# Altium PCB PDC_Rev_2.PcbDoc (part 3 of 3)
Units mil, origin at the board's own origin, x right, y up, seen from the top; angles counter-clockwise.
Board outline 5005 x 4200 mil, 4 copper layers (Top Layer, Signal_1, Signal_2, Bottom Layer), stack 23.756 mil thick; 184 components, 175 nets, 851 pads, 1149 vias.
Unrouted connection lines stored in the file: 187.
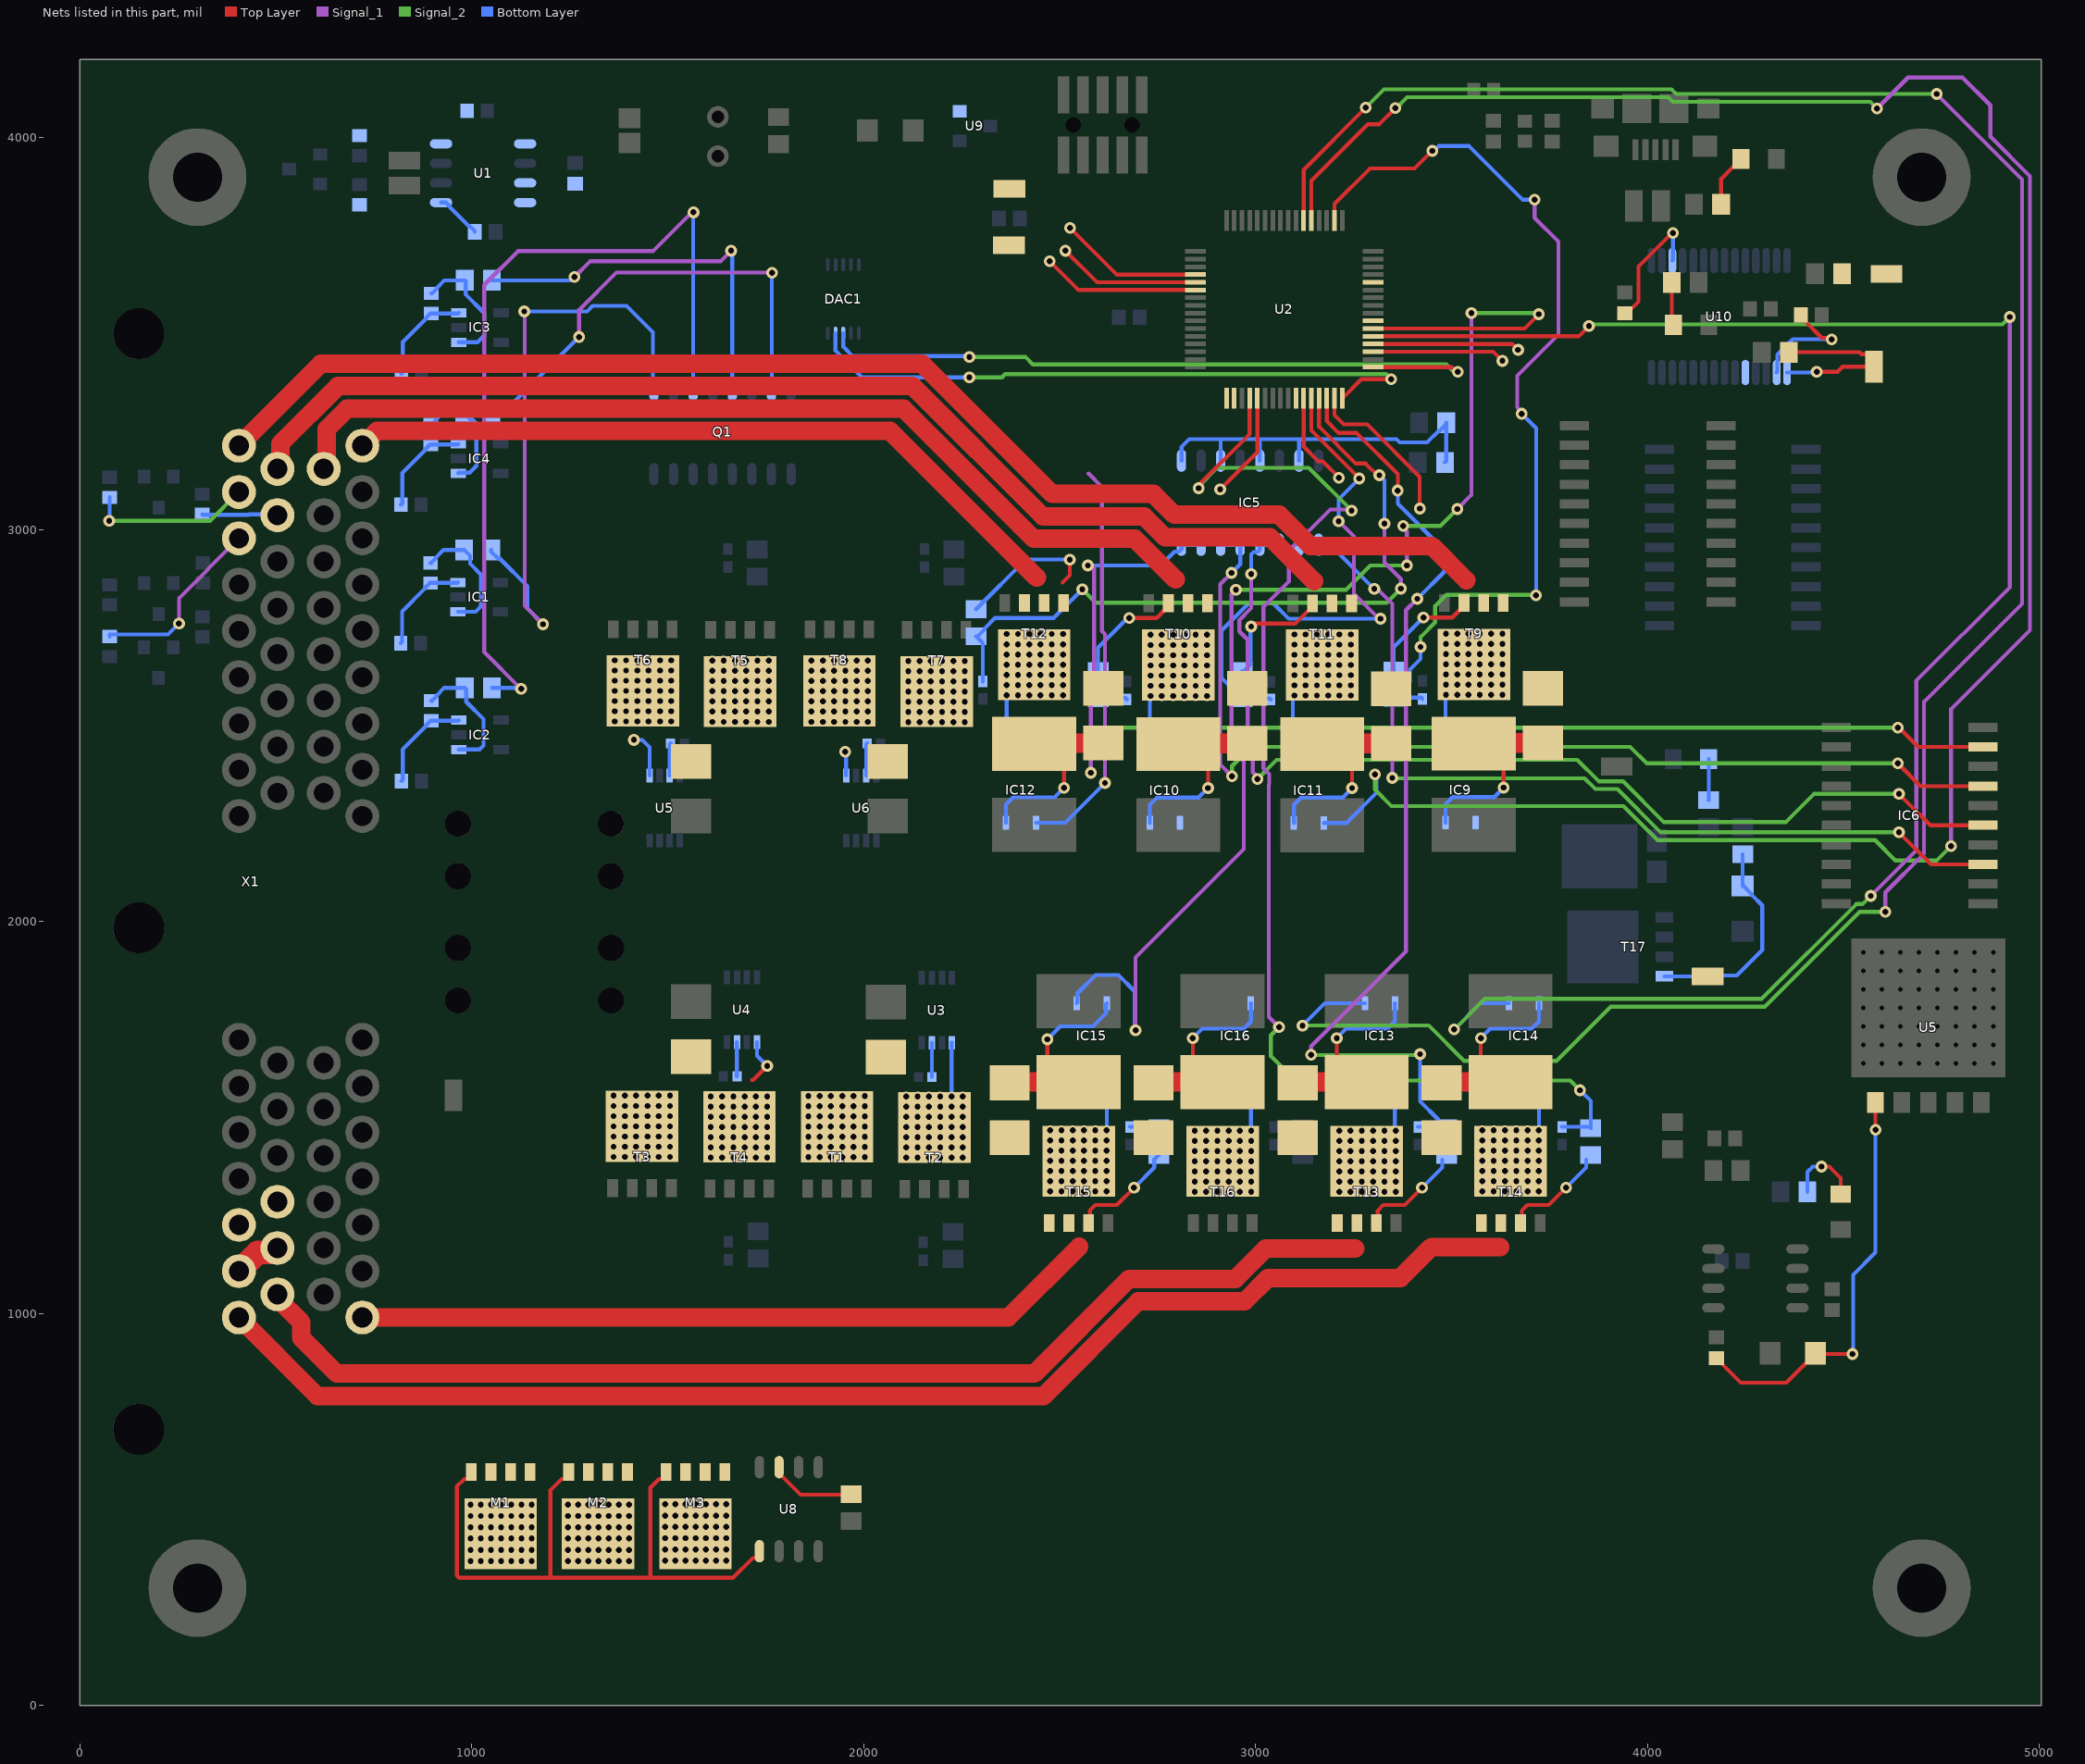
[diagram p5: the nets of this part, all layers, seen from the top]

## Via types
v1: diameter 25, hole 15, Top Layer to Bottom Layer, 876 vias
v2: diameter 30, hole 15, Top Layer to Bottom Layer, 268 vias
v3: diameter 50, hole 28, Top Layer to Bottom Layer, 4 vias
v4: diameter 55, hole 35, Top Layer to Bottom Layer, 1 vias

## Nets (pads, with @x,y where several pads share a name; then routed paths per layer and width w, separated by ;. In a path a pad name is that pad's centre, name@x,y a point inside that pad or via, vN(x,y) a via of type N, cw(c..) or ccw(c..) an arc to the next point about the centre after c; other vN are vias at no path point) (continued)
LC_2_ISENSE_ADC: IC15.5 U2.38 | length 3413.3
  Top Layer w10: U2.38@3300,3513.43 3686.43,3513.43 v2(3723,3550)
  Signal_1 w10: v2(2694,1723) 2694,1909 2970,2185 2970,2408 2939,2439 2939,2836 v2(2950,2847) ; v2(3377,3010) 3377,3004.59 3386,2995.59 v2(3386,2909) ; v2(3514.8,3053) 3551,3089.2 v2(3551,3553)
  Signal_2 w10: v2(2950,2847) 3231,2847 3293,2909 v2(3386,2909) ; v2(3377,3010) 3471.8,3010 v2(3514.8,3053) ; v2(3551,3553) 3720,3553 v2(3723,3550)
  Bottom Layer w10: IC15.5@2544.11,1791.89 2545.49,1793.28 2545.49,1817.49 2592,1864 2650,1864 2692,1822 2692,1725 v2(2694,1723)
LC_2_OUTPUT: R56.2 T15.1 T15.2 T15.3 X1.B7 | length 2183.6
  Top Layer w10: T15.3@2573.8,1231.47 2577.25,1234.92 2577.25,1263.25 2591,1277 2645.85,1277 v2(2690,1321.15)
  Top Layer w47.24: X1.B7@720.87,990.16 2369.18,990.16 2550.02,1171
  Bottom Layer w10: v2(2690,1321.15) 2741.62,1372.77 2741.62,1392.97 R56.2@2753.2,1404.55
LC_2_VSENSE_ADC: R56.1 R57.2 U2.21 | length 347.2
  Top Layer w10: v2(2910,3103) 3004.72,3197.72 U2.21@3004.72,3336.26
  Bottom Layer w10: R57.2@2679.81,1476.64 2750.01,1476.64 R56.1@2753.2,1473.45
LC_3_ISENSE_ADC: IC14.5 U2.37 | length 4640.8
  Top Layer w10: U2.37@3300,3493.74 3824.74,3493.74 v2(3851,3520)
  Signal_1 w10: v2(4570,2066) 4686,2182 4686,2614.72 4925,2853.72 v2(4925,3543)
  Signal_2 w10: v2(3507,1725) 3585.09,1803.09 4291.02,1803.09 4532.93,2045 4548.57,2045 4569.57,2066 v2(4570,2066) ; v2(3851,3520) 3855,3524 4512.57,3524 4906,3524 v2(4925,3543)
  Bottom Layer w10: v2(3507,1725) 3573.89,1791.89 IC14.5@3646.37,1791.89
LC_3_OUTPUT: R53.2 T14.1 T14.2 T14.3 X1.B26 | length 3721.8
  Top Layer w10: T14.3@3676.06,1231.47 3679.51,1234.92 3679.51,1263.25 3693.26,1277 3748.11,1277 v2(3792.26,1321.15)
  Top Layer w47.24: X1.B26@405.91,990.16 606.31,789.76 2459.24,789.76 2701,1031.51 2972.47,1031.51 3031.96,1091 3370,1091 3449,1170 3624,1170
  Bottom Layer w10: v2(3792.26,1321.15) 3843.88,1372.77 R53.2@3843.88,1392.97
LC_3_VSENSE_ADC: R53.1 R54.2 U2.20 | length 3294.4
  Top Layer w10: v2(2855,3106) 2855,3114 2985.04,3244.04 U2.20@2985.04,3336.26
  Signal_1 w10: v2(3060,1731) 3034,1757 3034,2350.57 3035,2351.57 3035,2376.43 3020,2391.43 3020,2803 3085,2868 3085,2946 3191,3052 3242,3052 v2(3245,3049)
  Signal_2 w10: v2(2855,3106) 2855,3111 2902,3158 3136,3158 v2(3245,3049) ; v2(3060,1731) 3039,1710 3039,1657 3101,1595 3803,1595 v2(3828,1570)
  Bottom Layer w10: R54.2@3782.08,1476.64 3850.64,1476.64 R53.1@3852,1478 ; v2(3828,1570) 3855.46,1542.54 R53.1@3855.46,1473.45
LC_4_ISENSE_ADC: IC13.5 U2.54 | length 6021
  Top Layer w10: U2.54@3122.83,3789.02 3122.83,3918.83 v2(3281,4077)
  Signal_1 w10: v2(4607,2025) 4607,2074.72 4706,2173.72 4706,2561 4956,2811 4956,3894 v2(4738,4112)
  Signal_2 w10: v2(3120,1735) 3442,1735 3532,1645 3768,1645 3906.09,1783.09 4299.3,1783.09 4541.21,2025 v2(4607,2025) ; v2(3281,4077) 3328,4124 4061.44,4124 4073.44,4112 v2(4738,4112)
  Bottom Layer w10: v2(3120,1735) 3176.89,1791.89 IC13.5@3278.95,1791.89
LC_4_OUTPUT: R50.2 T13.1 T13.2 T13.3 X1.B19 | length 3259.3
  Top Layer w10: T13.3@3308.64,1231.47 3312.09,1234.92 3312.09,1263.25 3325.84,1277 3380.69,1277 v2(3424.84,1321.15)
  Top Layer w47.24: X1.B19@504.33,1049.21 504.33,1038.56 565.2,977.69 565.2,937.91 656.1,847 2435.53,847 2677.29,1088.76 2948.76,1088.76 3026,1166 3255,1166
  Bottom Layer w10: v2(3424.84,1321.15) 3476.46,1372.77 R50.2@3476.46,1392.97
LC_4_VSENSE_ADC: R50.1 R51.2 U2.30 | length 2532.8
  Top Layer w10: U2.30@3181.89,3336.26 3181.89,3277.11 3212,3247 3258,3247 3363,3142 v2(3363,3100)
  Signal_1 w10: v2(3142,1660) 3142,1682 3384,1924 3384,2795 v2(3413,2824)
  Signal_2 w10: v2(3142,1660) 3418,1660 v2(3420,1662)
  Bottom Layer w10: v2(3363,3100) 3363,3066.43 3482,2947.43 3482,2893 v2(3413,2824) ; R51.2@3414.66,1476.64 3480.36,1476.64 R50.1@3481,1476 ; v2(3420,1662) 3420,1541.49 3466.47,1495.02 3466.47,1491.09 3484.11,1473.45 R50.1@3488.04,1473.45
LC_5_ISENSE_ADC: IC12.5 U2.36 | length 1401.7
  Top Layer w10: U2.36@3300,3474.06 3654.94,3474.06 v2(3670,3459)
  Signal_1 w10: 2574,3144 2608,3110 2608,2742.01 2616,2734.01 v2(2616,2354)
  Bottom Layer w10: IC12.5@2439.96,2252.58 2514.58,2252.58 v2(2616,2354)
LC_5_OUTPUT: R47.2 T12.1 T12.2 T12.3 X1.A1 | length 2248.5
  Top Layer w10: 2508,2866 2526,2884 v2(2526,2924)
  Top Layer w47.24: X1.A1@720.87,3214.57 758.3,3252 2067.73,3252 2442,2877.73
  Bottom Layer w10: R47.2@2287,2797.45 2413.55,2924 v2(2526,2924)
LC_5_VSENSE_ADC: R47.1 R48.2 U2.29 | length 1876.8
  Top Layer w10: U2.29@3162.2,3336.26 3162.2,3262.8 3256,3169 3281,3169 3311,3139 v2(3316,3139)
  Signal_1 w10: v2(3328.84,3016) 3328.84,2916.73 3371,2874.57 v2(3371,2850)
  Signal_2 w10: v2(2558,2848) 2592,2814 3335,2814 v2(3371,2850)
  Bottom Layer w10: R48.2@2304.26,2613.11 2304.26,2711.3 R47.1@2287,2728.55 2290.94,2728.55 2308.57,2746.19 2308.57,2748.6 2334.98,2775 2485,2775 v2(2558,2848) ; v2(3316,3139) 3328.84,3126.16 v2(3328.84,3016)
LC_6_ISENSE_ADC: IC11.5 U2.53 | length 5826.5
  Top Layer w10: U2.53@3142.52,3789.02 3142.52,3890.52 3287,4035 3316,4035 v2(3357,4076)
  Signal_1 w10: v2(4586,4075) 4665,4154 4804,4154 4875,4083 4875,4003.28 4976,3902.28 4976,2744 4775,2543 v2(4775,2193)
  Signal_2 w10: v2(3305,2376) 3305,2337 3347,2295 3938.72,2295 4025.72,2208 4581,2208 4633,2156 4738,2156 v2(4775,2193) ; v2(3357,4076) 3358,4075 3387,4104 4053.15,4104 4065.15,4092 4569,4092 v2(4586,4075)
  Bottom Layer w10: IC11.5@3174.81,2252 3232,2252 3309,2329 3309,2372 v2(3305,2376)
LC_6_OUTPUT: R44.2 T11.1 T11.2 T11.3 X1.A18 | length 3260.4
  Top Layer w10: v2(2989,2753) 2996.5,2760.5 3100.82,2760.5 T11.3@3135.1,2794.79
  Top Layer w47.24: X1.A18@504.33,3155.51 511.86,3163.04 511.86,3219.82 658.53,3366.49 2125.47,3366.49 2457.71,3034.24 2715.71,3034.24 2768.96,2981 3037,2981 3149,2869
  Bottom Layer w10: R44.2@2965.71,2639.34 2969.65,2639.34 2987.29,2656.98 2987.29,2751.29 v2(2989,2753)
LC_6_VSENSE_ADC: R44.1 R45.2 U2.28 | length 1408.6
  Top Layer w10: U2.28@3142.52,3336.26 3142.52,3253.48 v2(3265,3131)
  Signal_1 w10: v2(3212,3022) 3251,2983 3251,2837 3315,2773 v2(3319,2773)
  Bottom Layer w10: R44.1@2965.71,2570.44 R44.1@2964.44,2570.44 ; R45.2@3039.1,2567.26 3036.35,2570 2964,2570 R44.1@2964.44,2570.44 ; v2(3212,3022) 3212,3078 v2(3265,3131) ; v2(3319,2773) 3085,2773 3044,2814 2984,2814 2913,2743 2913,2621.63 2944.14,2590.49 2944.14,2588.08 2961.78,2570.44 R44.1@2964.44,2570.44
LC_7_ISENSE_ADC: IC10.5 U2.31 | length 407.5
  Top Layer w10: U2.31@3201.57,3336.26 3201.57,3292.43 3225,3269 3285,3269 3419,3135 v2(3419,3054)
LC_7_OUTPUT: R41.2 T10.1 T10.2 T10.3 X1.A10 | length 2764.4
  Top Layer w10: v2(2678,2775) 2678.11,2774.89 2747.68,2774.89 2767.68,2794.89 2768.91,2794.89 2777.69,2803.67 T10.3@2777.69,2812.53
  Top Layer w47.24: X1.A10@622.44,3155.51 629.97,3163.04 629.97,3256.97 682.24,3309.24 2101.76,3309.24 2434,2977 2692,2977 2796,2873
  Bottom Layer w10: R41.2@2598.29,2639.45 2598.29,2699.29 2674,2775 v2(2678,2775)
LC_7_VSENSE_ADC: R41.1 R42.2 U2.27 | length 321.8
  Top Layer w10: U2.27@3122.83,3336.26 3122.83,3212.17 3160.5,3174.5 3171.5,3174.5 v2(3213,3133)
  Bottom Layer w10: R41.1@2598.29,2570.55 2668.49,2570.55 R42.2@2671.68,2567.36
LC_8_ISENSE_ADC: IC9.5 U2.26
LC_8_OUTPUT: R38.2 T9.1 T9.2 T9.3 X1.A26 | length 3716.5
  Top Layer w10: v2@3428.49,2776 3502.07,2776 T9.3@3522.07,2796
  Top Layer w47.24: X1.A26@405.91,3214.57 615.07,3423.73 2149.18,3423.73 2481.42,3091.49 2739.42,3091.49 2792.67,3038.24 3060.71,3038.24 3139.96,2959 3450,2959 3538,2871
  Bottom Layer w10: R38.2@3352.68,2640.56 3352.68,2700.4 v2(3428.39,2776.11)
LC_8_VSENSE_ADC: R38.1 R39.2 U2.50 | length 2390.9
  Top Layer w10: U2.50@3201.57,3789.02 3201.57,3831.57 3292,3922 3406,3922 v2(3451,3967)
  Signal_1 w10: v2(3679,3296) 3679,3300.86 3668,3311.86 3668,3393 3773,3498 3773,3735 3712,3796 v2(3712,3842)
  Signal_2 w10: v2(3421,2701) 3421,2726.29 3458.39,2763.68 3458.39,2805.39 3487,2834 3715,2834 3716,2835 v2(3716,2833)
  Bottom Layer w10: R38.1@3352.68,2571.66 R38.1@3356.61,2571.66 ; v2(3421,2701) 3421,2670.26 3394.25,2643.51 3394.25,2611.7 3374.25,2591.7 3374.25,2589.3 R38.1@3356.61,2571.66 ; R39.2@3426.06,2568.47 3422.87,2571.66 R38.1@3356.61,2571.66 ; v2(3451,3967) 3454.86,3967 3466.86,3979 3545,3979 3682,3842 v2(3712,3842) ; v2(3679,3296) 3716,3259 v2(3716,2833)
MOSI: DAC1.8 U2.33 | length 1849.9
  Top Layer w10: U2.33@3300,3415 3500.14,3415 3512.14,3403 v2(3516,3403)
  Signal_2 w10: v2(2270,3441) 2413,3441 2432,3422 3487,3422 3506,3403 v2(3516,3403)
  Bottom Layer w10: DAC1.8@1948,3501.4 1948,3467 1972,3443 2268,3443 v2(2270,3441)
NetC7_2: C7.2 U3.3 | length 87.2
  Bottom Layer w10: U3.3@2174.2,1691.11 2174.2,1604.12 C7.2@2174.32,1604
NetC8_2: C8.2 U4.3 | length 87.2
  Bottom Layer w10: U4.3@1676.73,1692.41 1676.73,1605.42 C8.2@1676.85,1605.3
NetC9_2: C9.2 U5.3@1505,2372.89 | length 83.2
  Bottom Layer w10: U5.3@1505,2372.89 1505,2452.32 C9.2@1507.68,2455
NetC10_2: C10.2 U6.3 | length 83.2
  Bottom Layer w10: U6.3@2006.44,2372.89 2006.44,2452.32 C10.2@2009.11,2455
NetC11_2: C11.2 IC9.3
NetC12_2: C12.2 IC10.3
NetC13_2: C13.2 IC11.3
NetC14_2: C14.2 IC12.3
NetC15_2: C15.2 IC13.3 | length 75.1
  Bottom Layer w10: IC13.3@3304.54,1626.11 3304.54,1552.14 C15.2@3305.32,1551.35
NetC16_2: C16.2 IC14.3 | length 75
  Bottom Layer w10: C16.2@3671.32,1551.35 3671.96,1551.99 IC14.3@3671.96,1626.11
NetC17_2: C17.2 IC15.3 | length 84.6
  Bottom Layer w10: C17.2@2564.32,1546 2567.37,1549.05 2567.37,1626.37 2568,1627 2568.89,1626.11 IC15.3@2569.7,1626.11
NetC18_2: C18.2 IC16.3 | length 76.8
  Bottom Layer w10: C18.2@2935.32,1550 2937.12,1551.79 IC16.3@2937.12,1626.11
NetC20_2: C20.2 D5.2 U5.1@4581.46,1538.86 | length 1070.6
  Top Layer w10: C20.2@4176,886 4177.97,886 4190.69,873.28 4190.69,871.31 4238,824 4354.47,824 4405.53,875.06 4407.5,875.06 4429.44,897 v2(4523,897) ; U5.1@4581.46,1538.86 4581.46,1469.54 v2(4582,1469)
  Bottom Layer w10: v2(4523,897) 4525,899 4525,1099 4582,1156 v2(4582,1469)
NetC24_1: C24.1 U10.2 | length 307.9
  Top Layer w10: C24.1@4391.85,3548 4404.57,3535.28 4404.57,3529.82 4445.25,3489.14 4466.86,3489.14 v2(4470,3486)
  Bottom Layer w10: U10.2@4329.8,3401.28 4331.57,3403.06 4331.57,3446.68 4370.89,3486 v2(4470,3486)
NetD7_1: D7.1 OVP_G.1 R66.2 T17.4 | length 543.4
  Bottom Layer w10: T17.4@4043.58,1860.73 OVP_G.1@4153.62,1860.73 4155.89,1863 4228,1863 4293,1928 4293,2041.59 4266.73,2067.86 4266.73,2069.83 4245.15,2091.41 D7.1@4243.18,2091.41 4242.97,2091.62 R66.2@4242.97,2172.28
NetD9_1: D9.1 R70.1 | length 109.2
  Top Layer w10: R70.1@4061.98,3630.47 4061.98,3527.17 D9.1@4066.15,3523
NetD10_1: D10.1 R71.1 | length 139.3
  Top Layer w10: R71.1@4187.87,3830 4187.87,3895.2 4218.08,3925.41 4222.02,3925.41 4238.67,3942.06 D10.1@4238.67,3946
NetIC1_1: IC1.1 R1.2 R2.1 | length 325.9
  Bottom Layer w10: R1.2@894.95,2915.59 896.92,2915.59 908.65,2927.32 908.65,2929.29 928.01,2948.65 R2.1@980.55,2948.65 995.66,2933.53 995.66,2913.34 1023,2886 1023,2804.29 1009.71,2791 IC1.1@965,2791
NetIC1_3: IC1.3 R1.1 R3.2 | length 257
  Bottom Layer w10: R3.2@818.54,2710.8 822.13,2714.39 822.13,2791.59 881.25,2850.71 881.25,2852.68 892.98,2864.41 R1.1@894.95,2864.41 963.61,2864.41 IC1.3@965,2865.8
NetIC2_1: IC2.1 R4.2 R5.1 | length 334.7
  Bottom Layer w10: R4.2@896.82,2563.79 898.79,2563.79 910.52,2575.52 910.52,2577.49 929.87,2596.84 R5.1@982.42,2596.84 985.87,2593.39 985.87,2561.13 1030,2517 1030,2449.79 1020,2439.79 967.46,2439.79 IC2.1@966.87,2439.2
NetIC2_3: IC2.3 R4.1 R6.2 | length 257
  Bottom Layer w10: R6.2@820.41,2359 824,2362.59 824,2439.79 883.12,2498.91 883.12,2500.87 894.85,2512.61 R4.1@896.82,2512.61 965.47,2512.61 IC2.3@966.87,2514
NetIC3_1: IC3.1 R7.2 R8.1 | length 333.6
  Bottom Layer w10: R7.2@896.82,3603.19 898.79,3603.19 910.52,3614.92 910.52,3616.89 929.87,3636.25 R8.1@982.42,3636.25 984.47,3634.19 984.47,3600.53 1032,3553 1032,3496 1014.6,3478.6 IC3.1@966.87,3478.6
NetIC3_3: IC3.3 R7.1 R9.2 | length 257
  Bottom Layer w10: R9.2@820.41,3398.4 824,3401.99 824,3479.19 883.12,3538.31 883.12,3540.28 894.85,3552.01 R7.1@896.82,3552.01 965.47,3552.01 IC3.3@966.87,3553.4
NetIC4_1: IC4.1 R10.2 R11.1 | length 308.4
  Bottom Layer w10: R10.2@895.68,3268.79 897.65,3268.79 909.38,3280.52 909.38,3282.49 928.74,3301.84 R11.1@981.28,3301.84 981.28,3297.91 998.92,3280.27 1002.86,3280.27 1012,3271.13 1012,3163 994.56,3145.56 967.09,3145.56 IC4.1@965.73,3144.2
NetIC4_3: IC4.3 R10.1 R12.2 | length 257
  Bottom Layer w10: R12.2@819.28,3064 822.87,3067.59 822.87,3144.79 881.98,3203.91 881.98,3205.87 893.71,3217.61 R10.1@895.68,3217.61 964.34,3217.61 IC4.3@965.73,3219
NetIC5_1: IC5.1 IC5.2 IC6.3 | length 2343
  Top Layer w10: v2(4642,2228) 4724,2146 IC6.3@4856.01,2146
  Signal_1 w10: v2(3303,2849) 3311,2849 3349,2811 v2(3349,2367)
  Signal_2 w10: v2(3349,2367) 3350,2366 3839.51,2366 3867.15,2338.36 3923.64,2338.36 4034,2228 v2(4642,2228)
  Bottom Layer w10: IC5.2@3111,2961.72 IC5.1@3161,2961.72 3190.28,2961.72 v2(3303,2849)
NetIC5_3: IC5.3 IC5.4 IC6.5 | length 2694.2
  Top Layer w10: v2(4642,2326) 4722,2246 IC6.5@4856.01,2246
  Signal_1 w10: v2(2989,2887) 2989,2800 2959,2770 2959,2740.57 2980,2719.57 2980,2445 2993,2432 2993,2381.41 3005,2369.41 v2(3005,2364)
  Signal_2 w10: v2(3005,2364) 3054,2413 3820.79,2413 3875.43,2358.36 3937.64,2358.36 4042,2254 4353,2254 4425,2326 v2(4642,2326)
  Bottom Layer w10: v2(2989,2887) 2989,2937.35 2994.86,2943.21 3004.71,2943.21 3011,2949.5 IC5.4@3011,2961.72 IC5.3@3061,2961.72
NetIC5_5: IC5.5 IC5.6 IC6.7 | length 2678
  Top Layer w10: v2(4639,2404) 4697,2346 IC6.7@4856.01,2346
  Signal_1 w10: v2(2939,2890) 2910,2861 2910,2401 v2(2940,2371)
  Signal_2 w10: v2(2940,2371) 2940,2397 2989,2446 3956.21,2446 3998.21,2404 v2(4639,2404)
  Bottom Layer w10: IC5.6@2911,2961.72 IC5.5@2961,2961.72 2961,2912 v2(2939,2890)
NetIC5_7: IC5.7 IC5.8 IC6.9 | length 3247.3
  Top Layer w10: v2(4639,2495) 4642,2495 4691,2446 IC6.9@4856.01,2446
  Signal_1 w10: v2(2572,2909) 2582.41,2909 2583,2909.59 2588,2904.59 2588,2619.92 2580,2611.92 v2(2580,2380)
  Signal_2 w10: v2(2580,2380) 2580,2448 2627,2495 v2(4639,2495)
  Bottom Layer w10: v2(2572,2909) 2758.28,2909 2793.68,2944.39 2804.71,2944.39 2811,2950.68 IC5.8@2811,2961.72 IC5.7@2861,2961.72
NetIC5_9: IC5.9 IC5.11 IC5.13 IC5.15 R16.1 R?.1 | length 1008.1
  Bottom Layer w10: IC5.9@2811,3176.28 2811,3211 2831,3231 2911,3231 ; IC5.11@2911,3176.28 2911,3231 ; IC5.13@3011,3176.28 3011,3231 ; IC5.15@3111,3176.28 3111,3229 3113,3231 ; R16.1@3483.29,3172 3486.45,3175.16 R?.1@3486.45,3269.06 ; R?.1@3486.45,3273 R?.1@3486.45,3269.06 ; 2911,3231 3011,3231 ; 3011,3231 3113,3231 ; 3113,3231 3360,3231 3368,3223 3437.98,3223 3466.4,3251.43 3468.81,3251.43 R?.1@3486.45,3269.06
NetIC9_1: IC9.1 R37.1 T9.mb | length 160.4
  Bottom Layer w10: IC9.1@3485,2419 3485,2578 v1(3486,2579)
  other v1: 3514.8,2579 3543.6,2579 3572.4,2579 3601.2,2579 3630,2579 3486,2605 3514.8,2605 3543.6,2605 3572.4,2605 3601.2,2605 3630,2605 3486,2631 3514.8,2631 3543.6,2631 3572.4,2631 3601.2,2631 3630,2631 3486,2657 3514.8,2657 3543.6,2657 3572.4,2657 3601.2,2657 3630,2657 3486,2683 3514.8,2683 3543.6,2683 3572.4,2683 3601.2,2683 3630,2683 3486,2709 3514.8,2709 3543.6,2709 3572.4,2709 3601.2,2709 3630,2709 3486,2735 3514.8,2735 3543.6,2735 3572.4,2735 3601.2,2735 3630,2735
NetIC9_8: "PTC Fuse1.1" IC9.8 R37.2 | length 537.2
  Top Layer w10: 3557.27,2454.22 3569.4,2454.22 3633.3,2390.32 v2(3633.3,2342.11)
  Top Layer w50: 3559.28,2456.22 R37.2@3733.39,2456.22
  Bottom Layer w10: IC9.8@3485,2253.21 3485,2299.81 3503.3,2318.11 3609.3,2318.11 v2(3633.3,2342.11)
NetIC10_1: IC10.1 R40.1 T10.mb | length 158.7
  Bottom Layer w10: IC10.1@2730.61,2417.89 2730.61,2574.61 v1(2732,2576)
  other v1: 2760.8,2576 2789.6,2576 2818.4,2576 2847.2,2576 2876,2576 2732,2602 2760.8,2602 2789.6,2602 2818.4,2602 2847.2,2602 2876,2602 2732,2628 2760.8,2628 2789.6,2628 2818.4,2628 2847.2,2628 2876,2628 2732,2654 2760.8,2654 2789.6,2654 2818.4,2654 2847.2,2654 2876,2654 2732,2680 2760.8,2680 2789.6,2680 2818.4,2680 2847.2,2680 2876,2680 2732,2706 2760.8,2706 2789.6,2706 2818.4,2706 2847.2,2706 2876,2706 2732,2732 2760.8,2732 2789.6,2732 2818.4,2732 2847.2,2732 2876,2732
NetIC10_8: "PTC Fuse2.1" IC10.8 R40.2 | length 537.2
  Top Layer w10: 2802.89,2453.11 2815.01,2453.11 2878.91,2389.21 v2(2878.91,2341)
  Top Layer w50: 2804.9,2455.12 R40.2@2979,2455.12
  Bottom Layer w10: IC10.8@2730.61,2252.11 2730.61,2298.7 2748.91,2317 2854.91,2317 v2(2878.91,2341)
NetIC11_1: IC11.1 R43.1 T11.mb | length 162.1
  Bottom Layer w10: IC11.1@3098.04,2417.79 3098.04,2418.96 3095,2422 3095,2568.94 3099,2572.94 v1(3099,2577)
  other v1: 3127.8,2577 3156.6,2577 3185.4,2577 3214.2,2577 3243,2577 3099,2603 3127.8,2603 3156.6,2603 3185.4,2603 3214.2,2603 3243,2603 3099,2629 3127.8,2629 3156.6,2629 3185.4,2629 3214.2,2629 3243,2629 3099,2655 3127.8,2655 3156.6,2655 3185.4,2655 3214.2,2655 3243,2655 3099,2681 3127.8,2681 3156.6,2681 3185.4,2681 3214.2,2681 3243,2681 3099,2707 3127.8,2707 3156.6,2707 3185.4,2707 3214.2,2707 3243,2707 3099,2733 3127.8,2733 3156.6,2733 3185.4,2733 3214.2,2733 3243,2733
NetIC11_8: "PTC Fuse3.1" IC11.8 R43.2 | length 537.2
  Top Layer w10: 3170.31,2453 3182.44,2453 3246.33,2389.11 v2(3246.33,2340.89)
  Top Layer w50: 3172.32,2455.01 R43.2@3346.42,2455.01
  Bottom Layer w10: IC11.8@3098.04,2252 3098.04,2298.6 3116.33,2316.89 3222.33,2316.89 v2(3246.33,2340.89)
NetIC12_1: IC12.1 R46.1 T12.mb | length 162.7
  Bottom Layer w10: IC12.1@2363.19,2418.36 2363.19,2417.19 2365,2419 v1(2365,2578)
  other v1: 2393.8,2578 2422.6,2578 2451.4,2578 2480.2,2578 2509,2578 2365,2604 2393.8,2604 2422.6,2604 2451.4,2604 2480.2,2604 2509,2604 2365,2630 2393.8,2630 2422.6,2630 2451.4,2630 2480.2,2630 2509,2630 2365,2656 2393.8,2656 2422.6,2656 2451.4,2656 2480.2,2656 2509,2656 2365,2682 2393.8,2682 2422.6,2682 2451.4,2682 2480.2,2682 2509,2682 2365,2708 2393.8,2708 2422.6,2708 2451.4,2708 2480.2,2708 2509,2708 2365,2734 2393.8,2734 2422.6,2734 2451.4,2734 2480.2,2734 2509,2734
NetIC12_8: "PTC Fuse4.1" IC12.8 R46.2 | length 540.1
  Top Layer w10: 2437.47,2455.59 2435.47,2453.58 2447.59,2453.58 2511.49,2389.68 v2(2511.49,2341.47)
  Top Layer w50: 2437.47,2455.59 R46.2@2611.58,2455.59
  Bottom Layer w10: IC12.8@2363.19,2252.58 2363.19,2299.17 2381.49,2317.47 2487.49,2317.47 v2(2511.49,2341.47)
NetIC13_1: IC13.1 R49.1 T13.mb | length 159.9
  Bottom Layer w10: IC13.1@3355.72,1626.11 3355.72,1468.92 v1(3357.64,1467)
  other v1: 3213.64,1311 3242.44,1311 3271.24,1311 3300.04,1311 3328.84,1311 3357.64,1311 3213.64,1337 3242.44,1337 3271.24,1337 3300.04,1337 3328.84,1337 3357.64,1337 3213.64,1363 3242.44,1363 3271.24,1363 3300.04,1363 3328.84,1363 3357.64,1363 3213.64,1389 3242.44,1389 3271.24,1389 3300.04,1389 3328.84,1389 3357.64,1389 3213.64,1415 3242.44,1415 3271.24,1415 3300.04,1415 3328.84,1415 3357.64,1415 3213.64,1441 3242.44,1441 3271.24,1441 3300.04,1441 3328.84,1441 3357.64,1441 3213.64,1467 3242.44,1467 3271.24,1467 3300.04,1467 3328.84,1467
NetIC13_8: "PTC Fuse5.1" IC13.8 R49.2 | length 525.1
  Top Layer w10: v2(3207.42,1703) 3207.42,1654.79 3271.32,1590.89 3283.45,1590.89
  Top Layer w50: R49.2@3109.34,1590.89 3271.32,1590.89
  Bottom Layer w10: v2(3207.42,1703) 3231.42,1727 3337.42,1727 3355.72,1745.3 IC13.8@3355.72,1791.89
NetIC14_1: IC14.1 R52.1 T14.mb | length 158.2
  Bottom Layer w10: v1(3723,1468) 3723.14,1468.14 IC14.1@3723.14,1626.11
  other v1: 3579,1312 3607.8,1312 3636.6,1312 3665.4,1312 3694.2,1312 3723,1312 3579,1338 3607.8,1338 3636.6,1338 3665.4,1338 3694.2,1338 3723,1338 3579,1364 3607.8,1364 3636.6,1364 3665.4,1364 3694.2,1364 3723,1364 3579,1390 3607.8,1390 3636.6,1390 3665.4,1390 3694.2,1390 3723,1390 3579,1416 3607.8,1416 3636.6,1416 3665.4,1416 3694.2,1416 3723,1416 3579,1442 3607.8,1442 3636.6,1442 3665.4,1442 3694.2,1442 3723,1442 3579,1468 3607.8,1468 3636.6,1468 3665.4,1468 3694.2,1468
NetIC14_8: "PTC Fuse6.1" IC14.8 R52.2 | length 525.1
  Top Layer w10: v2(3574.84,1703) 3574.84,1654.79 3638.74,1590.89 3650.87,1590.89
  Top Layer w50: R52.2@3476.76,1590.89 3638.74,1590.89
  Bottom Layer w10: v2(3574.84,1703) 3598.84,1727 3704.84,1727 3723.14,1745.3 IC14.8@3723.14,1791.89
NetIC15_1: IC15.1 R55.1 T15.mb | length 158.5
  Bottom Layer w10: v1(2620,1468) 2620.88,1468.88 IC15.1@2620.88,1626.11
  other v1: 2476,1312 2504.8,1312 2533.6,1312 2562.4,1312 2591.2,1312 2620,1312 2476,1338 2504.8,1338 2533.6,1338 2562.4,1338 2591.2,1338 2620,1338 2476,1364 2504.8,1364 2533.6,1364 2562.4,1364 2591.2,1364 2620,1364 2476,1390 2504.8,1390 2533.6,1390 2562.4,1390 2591.2,1390 2620,1390 2476,1416 2504.8,1416 2533.6,1416 2562.4,1416 2591.2,1416 2620,1416 2476,1442 2504.8,1442 2533.6,1442 2562.4,1442 2591.2,1442 2620,1442 2476,1468 2504.8,1468 2533.6,1468 2562.4,1468 2591.2,1468
NetIC15_8: "PTC Fuse7.1" IC15.8 R55.2 | length 513.9
  Top Layer w10: v2(2469,1700) 2469,1656.35 2534.46,1590.89 2548.6,1590.89
  Top Layer w50: R55.2@2374.5,1590.89 2534.46,1590.89
  Bottom Layer w10: v2(2469,1700) 2501.76,1732.76 2585,1732.76 2619.02,1766.77 2619.02,1790.03 IC15.8@2620.88,1791.89
NetIC16_1: IC16.1 R58.1 T16.mb | length 159.4
  Bottom Layer w10: IC16.1@2988.3,1626.11 2988.3,1467.7 v1(2989,1467)
  other v1: 2845,1311 2873.8,1311 2902.6,1311 2931.4,1311 2960.2,1311 2989,1311 2845,1337 2873.8,1337 2902.6,1337 2931.4,1337 2960.2,1337 2989,1337 2845,1363 2873.8,1363 2902.6,1363 2931.4,1363 2960.2,1363 2989,1363 2845,1389 2873.8,1389 2902.6,1389 2931.4,1389 2960.2,1389 2989,1389 2845,1415 2873.8,1415 2902.6,1415 2931.4,1415 2960.2,1415 2989,1415 2845,1441 2873.8,1441 2902.6,1441 2931.4,1441 2960.2,1441 2989,1441 2845,1467 2873.8,1467 2902.6,1467 2931.4,1467 2960.2,1467
NetIC16_8: "PTC Fuse8.1" IC16.8 R58.2 | length 525.1
  Top Layer w10: v2(2840,1703) 2840,1654.79 2903.9,1590.89 2916.02,1590.89
  Top Layer w50: R58.2@2741.92,1590.89 2903.9,1590.89
  Bottom Layer w10: v2(2840,1703) 2864,1727 2970,1727 2988.3,1745.3 IC16.8@2988.3,1791.89
NetLED1_1: LED1.1 R63.2 | length 193.3
  Top Layer w10: v2(4444,1375) 4464,1375 4493,1346 LED1.1@4493,1305.28
  Bottom Layer w10: R63.2@4408.45,1311 4408.45,1361.45 4422,1375 v2(4444,1375)
NetLED2_2: LED2.2 R67.2 | length 104.6
  Bottom Layer w10: R67.2@4156.18,2310.18 4156.46,2310.45 LED2.2@4156.46,2414.69
NetM1_4: M1.4 M2.4 M3.4 U8.5 | length 1680
  Top Layer w10: M1.4@999,596 999,587.14 990.22,578.36 981.36,578.36 962,559 962,331.86 967.86,326 1201,326 ; M2.4@1247.4,596 1247.4,587.14 1238.62,578.36 1229.76,578.36 1201,549.6 1201,326 ; M3.4@1495.79,596 1495.79,587.14 1487.01,578.36 1478.15,578.36 1456,556.21 1456,326 ; U8.5@1734.34,393.72 1734.34,382.68 1728.05,376.39 1717.02,376.39 1666.63,326 1456,326 ; 1201,326 1456,326
NetQ1_9: Q1.9 R2.2 | length 1574.9
  Signal_1 w10: v2(1134,3557) 1135,3556 1135,2806 v2(1182,2759)
  Bottom Layer w10: R2.2@1049.45,2948.65 1049.45,2944.71 1067.09,2927.07 1071.02,2927.07 1142,2856.1 1142,2799 v2(1182,2759) ; v2(1134,3557) 1294.28,3557 1308.28,3571 1395,3571 1462,3504 1462,3386 1462.39,3385.61 1462.39,3359.24 Q1.9@1465,3356.64
NetQ1_11: Q1.11 R5.2 | length 2219.1
  Signal_1 w10: v2(1126,2594) 1032,2688 1032,3625 1118,3711 1462.43,3711 v2@1566,3814.57 ; v2(1566,3810) v2@1566,3814.57 ; v2@1566,3817 v2@1566,3814.57
  Bottom Layer w10: R5.2@1051.31,2596.84 1123.16,2596.84 v2(1126,2594) ; Q1.11@1565,3356.64 1565,3809 v2(1566,3810)
NetQ1_13: Q1.13 R8.2 | length 998.7
  Signal_1 w10: v2(1262,3645) 1302,3685 1635,3685 v2(1662,3712)
  Bottom Layer w10: R8.2@1051.31,3636.25 1253.25,3636.25 v2(1262,3645) ; v2(1662,3712) 1665,3709 Q1.13@1665,3356.64
NetQ1_15: Q1.15 R11.2 | length 1202.7
  Signal_1 w10: v2(1274,3492) 1274,3561 1369,3656 v2(1766,3656)
  Bottom Layer w10: R11.2@1050.18,3301.84 1083.84,3301.84 v2(1274,3492) ; Q1.15@1765,3356.64 1766,3357.64 v2(1766,3656)
NetR25_1: R25.1 T1.mb T2.mb U3.1 | length 138.6
  Bottom Layer w10: v1(2224.2,1554) 2224.2,1690.91 2224,1691.11 U3.1@2225.39,1691.11
  other v1: 2109,1398 2137.8,1398 2166.6,1398 2195.4,1398 2224.2,1398 2253,1398 1859,1399 1887.8,1399 1916.6,1399 1945.4,1399 1974.2,1399 2003,1399 2109,1424 2137.8,1424 2166.6,1424 2195.4,1424 2224.2,1424 2253,1424 1859,1425 1887.8,1425 1916.6,1425 1945.4,1425 1974.2,1425 2003,1425 2109,1450 2137.8,1450 2166.6,1450 2195.4,1450 2224.2,1450 2253,1450 1859,1451 1887.8,1451 1916.6,1451 1945.4,1451 1974.2,1451 2003,1451 2109,1476 2137.8,1476 2166.6,1476 2195.4,1476 2224.2,1476 2253,1476 1859,1477 1887.8,1477 1916.6,1477 1945.4,1477 1974.2,1477 2003,1477 2109,1502 2137.8,1502 2166.6,1502 2195.4,1502 2224.2,1502 2253,1502 1859,1503 1887.8,1503 1916.6,1503 1945.4,1503 1974.2,1503 2003,1503 2109,1528 2137.8,1528 2166.6,1528 2195.4,1528 2224.2,1528 2253,1528 1859,1529 1887.8,1529 1916.6,1529 1945.4,1529 1974.2,1529 2003,1529 2109,1554 2137.8,1554 2166.6,1554 2195.4,1554 2253,1554 1859,1555 1887.8,1555 1916.6,1555 1945.4,1555 1974.2,1555 2003,1555
NetR28_1: R28.1 T3.mb T4.mb U4.1 | length 125.1
  Top Layer w10: 1715,1596 1718,1596 v2(1754,1632)
  Bottom Layer w10: U4.1@1727.91,1692.41 1727.91,1658.09 v2(1754,1632)
  other v1: 1610,1398 1638.8,1398 1667.6,1398 1696.4,1398 1725.2,1398 1754,1398 1362,1400 1390.8,1400 1419.6,1400 1448.4,1400 1477.2,1400 1506,1400 1610,1424 1638.8,1424 1667.6,1424 1696.4,1424 1725.2,1424 1754,1424 1362,1426 1390.8,1426 1419.6,1426 1448.4,1426 1477.2,1426 1506,1426 1610,1450 1638.8,1450 1667.6,1450 1696.4,1450 1725.2,1450 1754,1450 1362,1452 1390.8,1452 1419.6,1452 1448.4,1452 1477.2,1452 1506,1452 1610,1476 1638.8,1476 1667.6,1476 1696.4,1476 1725.2,1476 1754,1476 1362,1478 1390.8,1478 1419.6,1478 1448.4,1478 1477.2,1478 1506,1478 1610,1502 1638.8,1502 1667.6,1502 1696.4,1502 1725.2,1502 1754,1502 1362,1504 1390.8,1504 1419.6,1504 1448.4,1504 1477.2,1504 1506,1504 1610,1528 1638.8,1528 1667.6,1528 1696.4,1528 1725.2,1528 1754,1528 1362,1530 1390.8,1530 1419.6,1530 1448.4,1530 1477.2,1530 1506,1530 1610,1554 1638.8,1554 1667.6,1554 1696.4,1554 1725.2,1554 1754,1554 1362,1556 1390.8,1556 1419.6,1556 1448.4,1556 1477.2,1556 1506,1556
NetR31_1: R31.1 T5.mb T6.mb U5.1@1453.82,2372.89 | length 119.9
  Bottom Layer w10: v2(1414,2464) 1435,2464 1453.82,2445.18 U5.1@1453.82,2372.89
  other v1: 1614,2510 1642.8,2510 1671.6,2510 1700.4,2510 1729.2,2510 1758,2510 1365,2511 1393.8,2511 1422.6,2511 1451.4,2511 1480.2,2511 1509,2511 1614,2536 1642.8,2536 1671.6,2536 1700.4,2536 1729.2,2536 1758,2536 1365,2537 1393.8,2537 1422.6,2537 1451.4,2537 1480.2,2537 1509,2537 1614,2562 1642.8,2562 1671.6,2562 1700.4,2562 1729.2,2562 1758,2562 1365,2563 1393.8,2563 1422.6,2563 1451.4,2563 1480.2,2563 1509,2563 1614,2588 1642.8,2588 1671.6,2588 1700.4,2588 1729.2,2588 1758,2588 1365,2589 1393.8,2589 1422.6,2589 1451.4,2589 1480.2,2589 1509,2589 1614,2614 1642.8,2614 1671.6,2614 1700.4,2614 1729.2,2614 1758,2614 1365,2615 1393.8,2615 1422.6,2615 1451.4,2615 1480.2,2615 1509,2615 1614,2640 1642.8,2640 1671.6,2640 1700.4,2640 1729.2,2640 1758,2640 1365,2641 1393.8,2641 1422.6,2641 1451.4,2641 1480.2,2641 1509,2641 1614,2666 1642.8,2666 1671.6,2666 1700.4,2666 1729.2,2666 1758,2666 1365,2667 1393.8,2667 1422.6,2667 1451.4,2667 1480.2,2667 1509,2667
NetR34_1: R34.1 T7.mb T8.mb U6.1 | length 62
  Bottom Layer w10: v2(1953,2434) 1955.26,2431.74 U6.1@1955.26,2372.89
  other v1: 2114,2509 2142.8,2509 2171.6,2509 2200.4,2509 2229.2,2509 2258,2509 1867,2510 1895.8,2510 1924.6,2510 1953.4,2510 1982.2,2510 2011,2510 2114,2535 2142.8,2535 2171.6,2535 2200.4,2535 2229.2,2535 2258,2535 1867,2536 1895.8,2536 1924.6,2536 1953.4,2536 1982.2,2536 2011,2536 2114,2561 2142.8,2561 2171.6,2561 2200.4,2561 2229.2,2561 2258,2561 1867,2562 1895.8,2562 1924.6,2562 1953.4,2562 1982.2,2562 2011,2562 2114,2587 2142.8,2587 2171.6,2587 2200.4,2587 2229.2,2587 2258,2587 1867,2588 1895.8,2588 1924.6,2588 1953.4,2588 1982.2,2588 2011,2588 2114,2613 2142.8,2613 2171.6,2613 2200.4,2613 2229.2,2613 2258,2613 1867,2614 1895.8,2614 1924.6,2614 1953.4,2614 1982.2,2614 2011,2614 2114,2639 2142.8,2639 2171.6,2639 2200.4,2639 2229.2,2639 2258,2639 1867,2640 1895.8,2640 1924.6,2640 1953.4,2640 1982.2,2640 2011,2640 2114,2665 2142.8,2665 2171.6,2665 2200.4,2665 2229.2,2665 2258,2665 1867,2666 1895.8,2666 1924.6,2666 1953.4,2666 1982.2,2666 2011,2666
NetR64_2: R64.2 U8.3 | length 222.9
  Top Layer w10: U8.3@1784.34,608.28 1784.34,592.66 1839,538 1966.9,538 R64.2@1968.34,539.45
NetR68_1: R68.1 U10.1 UART_TX1.1 | length 468.7
  Top Layer w10: R68.1@4360.63,3453 4541,3453 4546.22,3447.78 4560.36,3447.78 4578,3430.14 UART_TX1.1@4578,3416 4497.86,3416 4484.86,3403 v2(4432,3403)
  Bottom Layer w10: U10.1@4356.42,3401.28 4430.28,3401.28 v2(4432,3403)
NetR69_1: R69.1 U10.5 UART_RX1.1
NetTEST_CANRX1_1: TEST_CANRX1.1 U1.4 U2.6 | length 402.5
  Top Layer w10: v2(2475,3685) 2548.15,3611.85 U2.6@2847.24,3611.85
NetTEST_CANTX1_1: TEST_CANTX1.1 U1.1 U2.5 | length 365.6
  Top Layer w10: v2(2515,3712) 2595.46,3631.54 U2.5@2847.24,3631.54
NetU2_17: U2.17
NetU2_18: U2.18
NetU2_35: U2.35 | length 339.7
  Top Layer w10: U2.35@3300,3454.37 3606.63,3454.37 v2(3630,3431)
NetU2_39: U2.39
NetU2_44: U2.44
RECTIFIER_IN: M1.mb M2.mb M3.mb X1.B17 X1.B24
  other v1: 997,368.52 1023,368.52 1049,368.52 1075,368.52 1101,368.52 1127,368.52 1153,368.52 1245.4,368.52 1271.4,368.52 1297.4,368.52 1323.4,368.52 1349.4,368.52 1375.4,368.52 1401.4,368.52 1493.79,369.52 1519.79,369.52 1545.79,369.52 1571.79,369.52 1597.79,369.52 1623.79,369.52 1649.79,369.52 997,397.32 1023,397.32 1049,397.32 1075,397.32 1101,397.32 1127,397.32 1153,397.32 1245.4,397.32 1271.4,397.32 1297.4,397.32 1323.4,397.32 1349.4,397.32 1375.4,397.32 1401.4,397.32 1493.79,398.32 1519.79,398.32 1545.79,398.32 1571.79,398.32 1597.79,398.32 1623.79,398.32 1649.79,398.32 997,426.12 1023,426.12 1049,426.12 1075,426.12 1101,426.12 1127,426.12 1153,426.12 1245.4,426.12 1271.4,426.12 1297.4,426.12 1323.4,426.12 1349.4,426.12 1375.4,426.12 1401.4,426.12 1493.79,427.12 1519.79,427.12 1545.79,427.12 1571.79,427.12 1597.79,427.12 1623.79,427.12 1649.79,427.12 997,454.92 1023,454.92 1049,454.92 1075,454.92 1101,454.92 1127,454.92 1153,454.92 1245.4,454.92 1271.4,454.92 1297.4,454.92 1323.4,454.92 1349.4,454.92 1375.4,454.92 1401.4,454.92 1493.79,455.92 1519.79,455.92 1545.79,455.92 1571.79,455.92 1597.79,455.92 1623.79,455.92 1649.79,455.92 997,483.72 1023,483.72 1049,483.72 1075,483.72 1101,483.72 1127,483.72 1153,483.72 1245.4,483.72 1271.4,483.72 1297.4,483.72 1323.4,483.72 1349.4,483.72 1375.4,483.72 1401.4,483.72 1493.79,484.72 1519.79,484.72 1545.79,484.72 1571.79,484.72 1597.79,484.72 1623.79,484.72 1649.79,484.72 997,512.52 1023,512.52 1049,512.52 1075,512.52 1101,512.52 1127,512.52 1153,512.52 1245.4,512.52 1271.4,512.52 1297.4,512.52 1323.4,512.52 1349.4,512.52 1375.4,512.52 1401.4,512.52 1493.79,513.52 1519.79,513.52 1545.79,513.52 1571.79,513.52 1597.79,513.52 1623.79,513.52 1649.79,513.52
RECTIFIER_OUT: M1.1 M1.2 M1.3 M2.1 M2.2 M2.3 M3.1 M3.2 M3.3 X1.B18 X1.B25 | length 122.9
  Top Layer w60: X1.B25@405.91,1108.27 453.42,1155.78 492.79,1155.78 X1.B18@504.33,1167.32
Relay_Sig_HC_1: R22.2 X1.A27 | length 421.6
  Signal_2 w10: v2(75,3023) 332.45,3023 X1.A27@405.91,3096.46
  Bottom Layer w10: v2(75,3023) 76,3024 R22.2@76,3082.82
Relay_Sig_HC_2: R19.2 X1.A19 | length 194.2
  Bottom Layer w10: R19.2@312,3039.41 313.26,3038.15 430.06,3038.15 431.32,3039.41 502.32,3039.41 X1.A19@504.33,3037.4
Relay_Sig_LC: R21.2 X1.A28 | length 474.8
  Signal_1 w10: v2(253,2761) 253,2825.44 X1.A28@405.91,2978.35
  Bottom Layer w10: R21.2@75.83,2727.59 75.83,2732.9 224.9,2732.9 v2(253,2761)
SCK: DAC1.9 U2.32 | length 1642.4
  Top Layer w10: U2.32@3222.48,3336.26 3270.22,3384 v2(3346,3384)
  Signal_2 w10: v2(2270,3389) 2353,3389 2361,3397 3333,3397 v2(3346,3384)
  Bottom Layer w10: DAC1.9@1928.31,3501.4 1928.31,3456.69 1996,3389 v2(2270,3389)
SPLIT: C2.2 R13.2 R14.1 U1.5 | length 119.1
  Bottom Layer w10: U1.5@921.72,3835 934.76,3835 941.06,3828.71 941.06,3826.6 992.74,3774.91 994.71,3774.91 1007.43,3762.19 C2.2@1007.43,3760.23
STBY: R15.2 U1.8
TEMP_SENSE: U2.4 U9.2 | length 369.4
  Top Layer w10: v2(2527,3770) 2645.78,3651.22 U2.4@2847.24,3651.22
VCC: C1.2 U1.3
VCC_3V3: C26.2 U10.17 | length 331.1
  Top Layer w10: C26.2@3942.43,3552.43 3955.14,3565.14 3960.61,3565.14 3977.11,3581.65 3977.11,3672.04 4062.07,3757 v2(4065,3757)
  Bottom Layer w10: U10.17@4063.66,3686.72 4065,3688.06 v2(4065,3757)
pads on no net: IC6.2 IC6.4 IC6.6 IC6.8 IC7.2 IC7.4 IC7.6 IC7.8 IC8.2 IC8.4 IC8.6 IC8.8 IC9.6 IC10.6 IC11.6 IC12.6 IC13.6 IC14.6 IC15.6 IC16.6 IC17.1 IC17.3 IC17.5 IC17.7 IC17.8 J1.4 J1.6 J1.7 J1.8 J1.9 J1.10 J1.11 P1.7 P1.9 P1.MH1 P1.MH2 U5.5@4852.32,1538.86 U5.6@4716.89,1780 U5.hole U8.2 U8.7 U10.3 U10.6 U10.8 U10.9 U10.10 U10.11 U10.12 U10.13 U10.14 U10.24 U10.27 U10.28 X1.B3 X1.B4 X1.CH X1.LH X1.RH

## Polygon pours and split planes (outlines as drawn)
+5 on Top Layer "Top Layer-+5" (solid, pour order 96): 4609,1587.97 4609,1371.76 4650,1338 4656,1338 4785,1338 4824,1377 4824,1588.88
DGND on Top Layer "Top Layer-DGND" (solid, pour order 94): 4670,1588.88 4759,1588.88 4759,1428 4720,1389 4707,1389 4670,1426
DVCC on Top Layer "Top Layer-DVCC" (solid, pour order 92): 3784.43,4013 3814,4042.57 3814,4104 3753,4165 3616,4165 3581,4130 3581,4055 3623,4013
LC_8_OUTPUT on Top Layer "Top Layer-LC_8_OUTPUT" (solid, pour order 14): 3654.81,2782.92 3654.63,2782.73 3508.81,2782.73 3508.81,2852.64 3500.81,2860.64 3500.81,2899.64 3509.81,2908.64 3622.81,2908.64 3654.81,2876.64
+12 on Top Layer "Top Layer-+12" (solid, pour order 26): 1309,1737 4018,1737 4018,2301 3994,2325 1309,2325
NetIC16_1 on Top Layer "Top Layer-NetIC16_1" (solid, pour order 46): 3016.42,1292 3016.42,1494 2822.42,1494 2676.42,1494 2676.42,1403 2786.42,1293 2845.42,1293
HC_3_OUTPUT on Top Layer "Top Layer-HC_2_OUTPUT" (solid, pour order 28): 1383.08,1353.6 1783.08,1353.6 1783.08,1266.6 1681.48,1165 666,1165 666,1291.6 1382.08,1291.6
NetR31_1 on Top Layer "Top Layer-NetR31_1" (solid, pour order 62): 1337,2688 1784,2688 1784,2511 1633,2360 1488,2360 1337,2511
HC_1_OUTPUT on Top Layer "Top Layer-HC_1_OUTPUT" (solid, pour order 6): 1888,2717 2286,2717 2286,2863 1941,3208 720,3208 536,3024 580,2980 580,2963 647,2963 713,3029 1561,3029 1813,2777 1888,2777
RECTIFIER_OUT on Top Layer "Top Layer-RECTIFIER_OUT" (solid, pour order 78): 1690,565.02 1690,757 539,757 311,985 373,1047 490,1047 620,1177 564.68,1232.32 385.32,1232.32 130,977 131,976 131,875 446,560
no net on Top Layer "Top Layer-No Net" (solid, pour order 70): 2318,2379
NetR25_1 on Top Layer "Top Layer-NetR25_1" (solid, pour order 68): 1834,1376 2281,1376 2281,1553 2130,1704 1985,1704 1834,1553
NetR28_1 on Top Layer "Top Layer-NetR28_1" (solid, pour order 66): 1336.52,1377.3 1783.52,1377.3 1783.52,1554.3 1632.52,1705.3 1487.52,1705.3 1336.52,1554.3
NetR34_1 on Top Layer "Top Layer-NetR34_1" (solid, pour order 64): 1838.44,2688 2285.44,2688 2285.44,2511 2134.44,2360 1989.44,2360 1838.44,2511
NetIC9_1 on Top Layer "Top Layer-NetIC9_1" (solid, pour order 58): 3456.88,2753.11 3456.88,2551.11 3650.88,2551.11 3796.88,2551.11 3796.88,2642.11 3686.88,2752.11 3627.88,2752.11
NetIC11_1 on Top Layer "Top Layer-NetIC11_1" (solid, pour order 56): 3069.91,2751.89 3069.91,2549.89 3263.91,2549.89 3409.91,2549.89 3409.91,2640.89 3299.91,2750.89 3240.91,2750.89
NetIC10_1 on Top Layer "Top Layer-NetIC10_1" (solid, pour order 54): 2702.49,2752 2702.49,2550 2896.49,2550 3042.49,2550 3042.49,2641 2932.49,2751 2873.49,2751
NetIC12_1 on Top Layer "Top Layer-NetIC12_1" (solid, pour order 52): 2335.07,2752.47 2335.07,2550.47 2529.07,2550.47 2675.07,2550.47 2675.07,2641.47 2565.07,2751.47 2506.07,2751.47
NetIC14_1 on Top Layer "Top Layer-NetIC14_1" (solid, pour order 50): 3751.26,1292 3751.26,1494 3557.26,1494 3411.26,1494 3411.26,1403 3521.26,1293 3580.26,1293
NetIC13_1 on Top Layer "Top Layer-NetIC13_1" (solid, pour order 48): 3383.84,1292 3383.84,1494 3189.84,1494 3043.84,1494 3043.84,1403 3153.84,1293 3212.84,1293
NetIC15_1 on Top Layer "Top Layer-NetIC15_1" (solid, pour order 44): 2649,1292 2649,1494 2455,1494 2309,1494 2309,1403 2419,1293 2478,1293
LC_6_OUTPUT on Top Layer "Top Layer-LC_6_OUTPUT" (solid, pour order 12): 3267.84,2781.7 3267.66,2781.52 3121.84,2781.52 3121.84,2851.42 3113.84,2859.42 3113.84,2898.42 3122.84,2907.42 3235.84,2907.42 3267.84,2875.42
LC_1_OUTPUT on Top Layer "Top Layer-LC_1_OUTPUT" (solid, pour order 20): 2963.95,1262.19 2963.77,1262.37 2817.95,1262.37 2817.95,1192.47 2809.95,1184.47 2809.95,1145.47 2818.95,1136.47 2931.95,1136.47 2963.95,1168.47
LC_2_OUTPUT on Top Layer "Top Layer-LC_2_OUTPUT" (solid, pour order 18): 2596.53,1262.19 2596.35,1262.37 2450.53,1262.37 2450.53,1192.47 2442.53,1184.47 2442.53,1145.47 2451.53,1136.47 2564.53,1136.47 2596.53,1168.47
12V_IN on Top Layer "Top Layer-12V_IN" (solid, pour order 42): 1012.57,1733 1012,1733.57 1012,2315 901,2315 766,2450 628,2450 563,2385 563,1529 762,1529 943.79,1710.79
HC_2_OUTPUT on Top Layer "Top Layer-HC_2_OUTPUT" (solid, pour order 4): 1385,2713 1785,2713 1785,2800 1556,3029 688,3029 648,2989 648,2804 1355,2804 1384,2775
LC_3_OUTPUT on Top Layer "Top Layer-LC_3_OUTPUT" (solid, pour order 24): 3698.79,1262.19 3698.61,1262.37 3552.79,1262.37 3552.79,1192.47 3544.79,1184.47 3544.79,1145.47 3553.79,1136.47 3666.79,1136.47 3698.79,1168.47
LC_4_OUTPUT on Top Layer "Top Layer-LC_4_OUTPUT" (solid, pour order 22): 3331.37,1262.19 3331.19,1262.37 3185.37,1262.37 3185.37,1192.47 3177.37,1184.47 3177.37,1145.47 3186.37,1136.47 3299.37,1136.47 3331.37,1168.47
LC_7_OUTPUT on Top Layer "Top Layer-LC_7_OUTPUT" (solid, pour order 10): 2900.42,2781.81 2900.24,2781.63 2754.42,2781.63 2754.42,2851.53 2746.42,2859.53 2746.42,2898.53 2755.42,2907.53 2868.42,2907.53 2900.42,2875.53
LC_5_OUTPUT on Top Layer "Top Layer-LC_5_OUTPUT" (solid, pour order 8): 2533,2782.28 2532.82,2782.1 2387,2782.1 2387,2852 2379,2860 2379,2899 2388,2908 2501,2908 2533,2876
HC_4_OUTPUT on Top Layer "Top Layer-HC_1_OUTPUT" (solid, pour order 30): 1882.12,1348.3 2280.12,1348.3 2280.12,1202.3 2119.12,1041.3 708,1041.3 575,1202.3 600.71,1245.29 691.41,1154.59 1673.41,1154.59 1807.12,1288.3 1882.12,1288.3
no net on Bottom Layer "Bottom Layer-No Net 3" (solid, pour order 76): 1929,556
no net on Bottom Layer "Bottom Layer-No Net 2" (solid, pour order 60): 1337,2688
RECTIFIER_IN on Bottom Layer "Bottom Layer-RECTIFIER_IN" (solid, pour order 40): 779.44,461.25 639.94,499.06 305.92,833.08
RECTIFIER_IN on Bottom Layer "Bottom Layer-RECTIFIER_IN 1" (solid, pour order 38): 803,342 468.5,468.5 139,834 139,1110 381,1352 559,1352 559,1254 464,1159 362,1159 362,1156 323,1117 323,897
no net on Bottom Layer "Bottom Layer-No Net" (solid, pour order 36): 1356,237
RECTIFIER_IN on Bottom Layer "Bottom Layer-RECTIFIER_IN 2" (solid, pour order 34): 1688,539.5 1688,341.23 795.93,342.02 657,488 657,537.31
no net on Bottom Layer "Bottom Layer-No Net 1" (solid, pour order 32): 1932,537

## Text inside footprints (layer, text, board x,y; h text height)
D9: Top Overlay "*" at 4171.43,3543 h60
D10: Top Overlay "*" at 4343.95,3966 h60
LED1: Top Overlay "*" at 4513,1200 h60 r270
LED2: Bottom Overlay "*" at 4171.18,2394.69 h60 r180
X1: Top Overlay "SUPER SEAL 60POS" at 860,3360 h60 r270